# Altium PCB V40_Test_Adapter.PcbDoc
Units mm, origin at the board's own origin, x right, y up, seen from the top; angles counter-clockwise.
Board outline 72.39 x 46.99 mm, 2 copper layers (Top Layer, Bottom Layer), stack 1.57 mm thick; 10 components, 9 nets, 26 pads, 32 vias.
Unrouted connection lines stored in the file: 13.
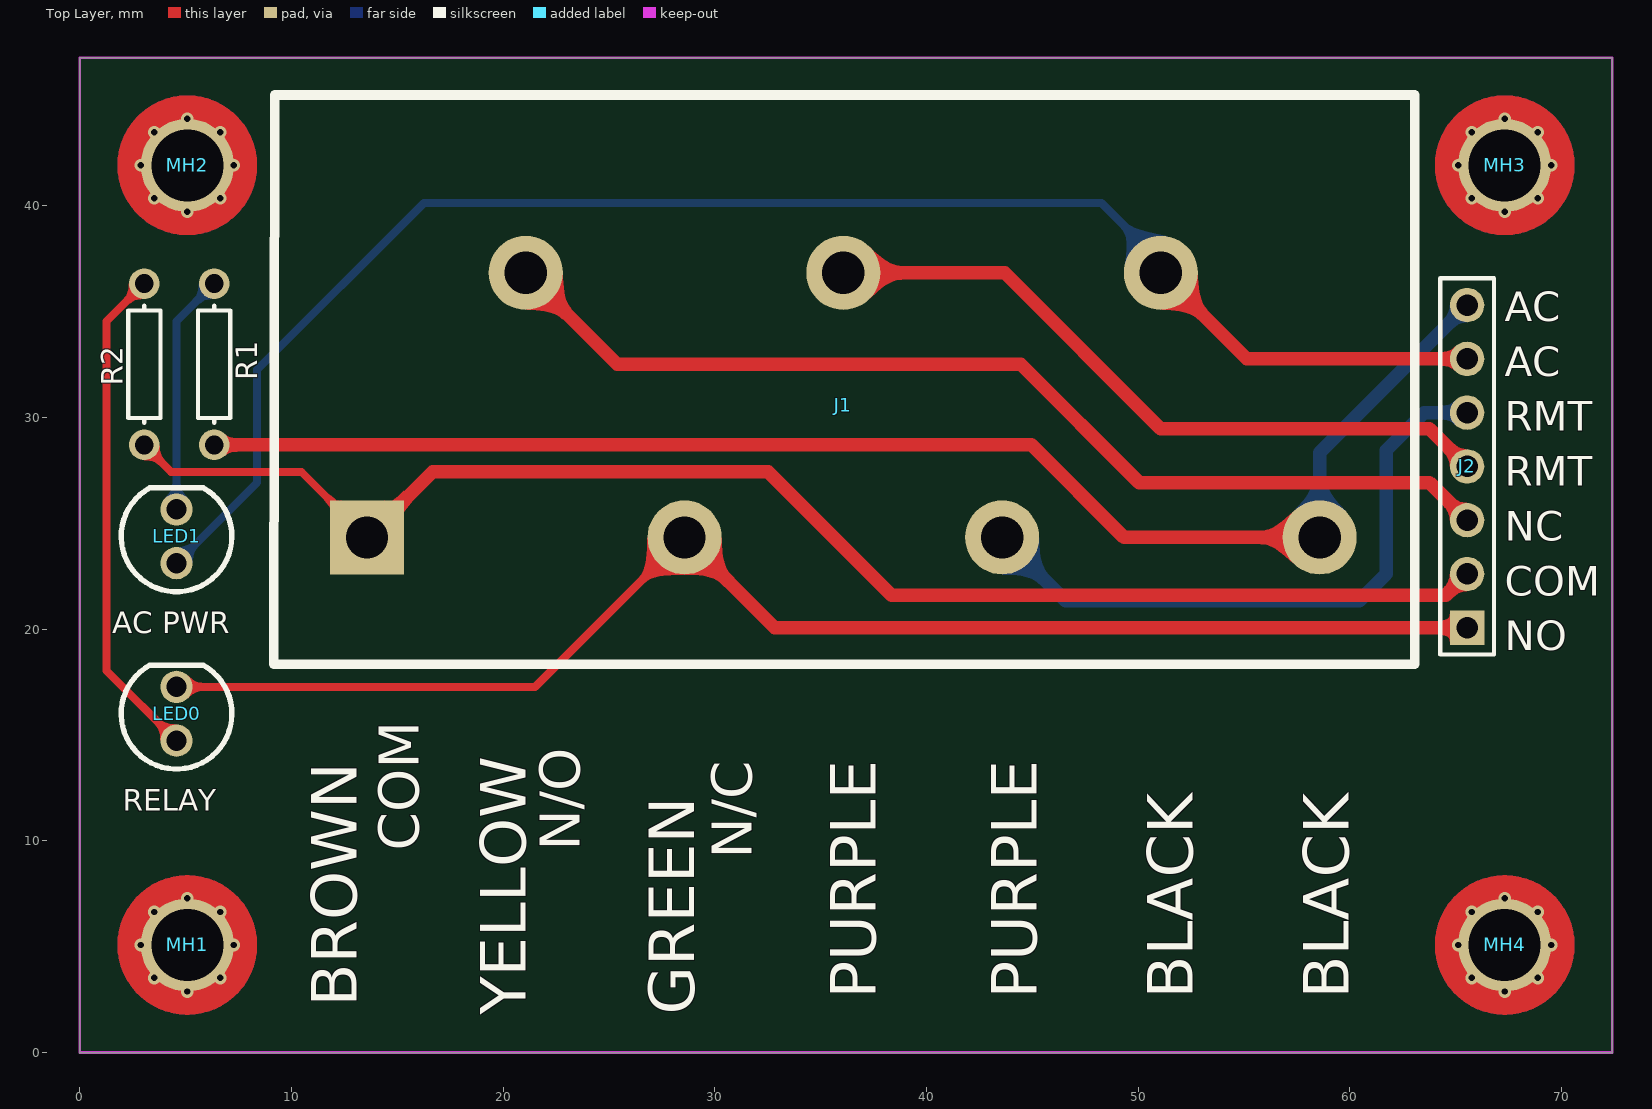
[diagram p0: Top Layer view]
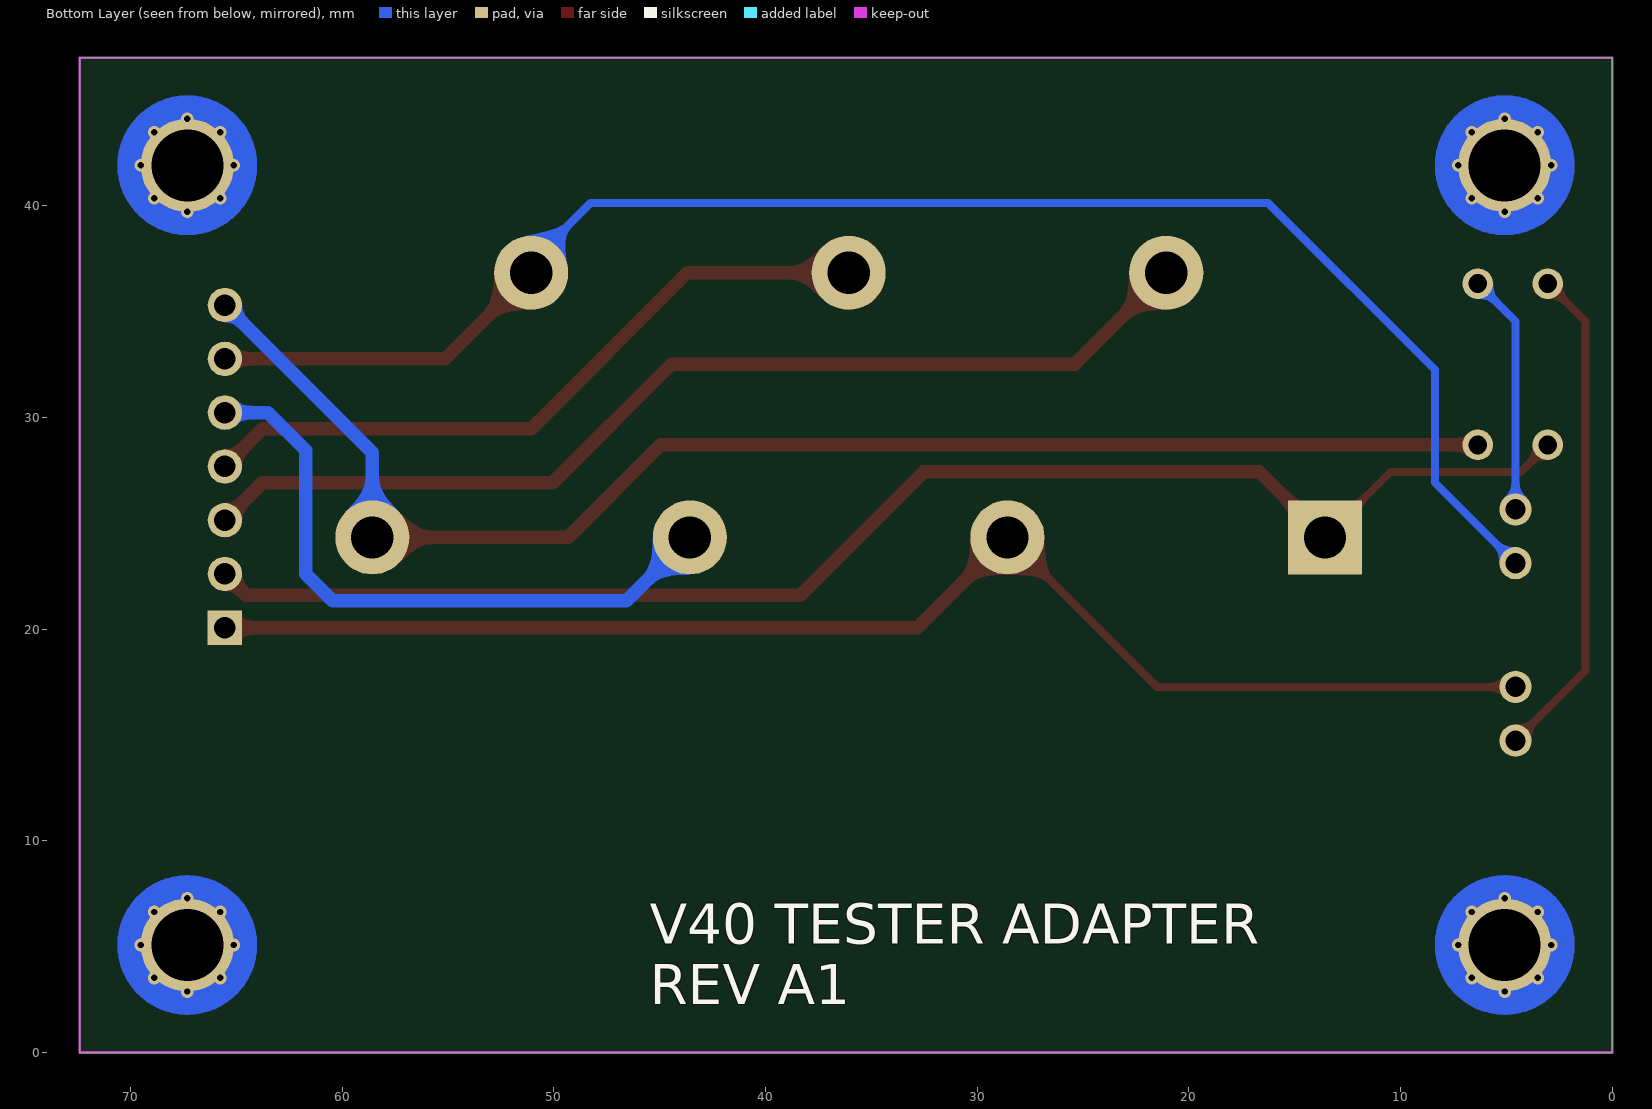
[diagram p1: Bottom Layer view, seen from below]

## Layer stack, top to bottom
Top Solder: solder mask 0.0102, Solder Resist, Dk 3.5
Top Layer: signal copper 0.0356
Dielectric 1: core 1.4986, Core-043, Dk 4.3
Bottom Layer: signal copper 0.0356
Bottom Solder: solder mask 0.0102, Solder Resist, Dk 3.5

## Board outline
0,0 72.39,0 72.39,46.99 0,46.99

## Design rules (kind name [scope] priority, off if disabled: settings)
BoardOutlineClearance [All] p1: gap=0.381 ignorepadtopadclearanceinfootprint=FALSE
Clearance [All] p1: gap=0.152 ignorepadtopadclearanceinfootprint=FALSE
Height [All] p1 off: minheight=0 maxheight=25.4 prefheight=12.7
HoleSize [All] p1: absolutevalues=TRUE maxlimit=3.81 minlimit=0.254 maxpercent=80.000 minpercent=20.000
MinimumAnnularRing [All] p1: minimumring=0.127
MinimumSolderMaskSliver [All] p1: minsoldermaskwidth=0.152
PolygonConnect [All] p1: connectstyle=Relief reliefconductorwidth=0.254 reliefentries=4 polygonreliefangle="90 Angle" airgapwidth=0.254
RoutingVias [All] p1: holewidth=0.711 width=1.27 viastyle="Through Hole" minholewidth=0.711 minwidth=1.27 maxholewidth=0.711 maxwidth=1.27
SilkToSilkClearance [All] p1 off: silktosilkclearance=0.254
SilkToSolderMaskClearance [IsPad] p1 off: minsilkscreentomaskgap=0.254 clearancetoexposedcopper=TRUE
SolderMaskExpansion [All] p1: expansion=0.102 istentingtop=FALSE
Width [All] p1: maxlimit=5.08 minlimit=0.152 preferedwidth=0.381
25 further rules are at their usual default settings.

## Components (designator, comment, footprint, x,y, rotation, side; value= is the part's Value field where it differs from the comment)
J1 "Connector" "PHOENIX TERMINAL BLOCK" 13.568,24.33 r0 top locked
J2 "From Tester" HDR1X7 65.532,20.066 r90 top locked
LED0 "RELAY" LED_2 4.572,14.732 r90 top locked
LED1 "AC PWR" LED_2 4.572,23.114 r90 top locked
MH1 "Mounting Hole" "MOUNTING HOLE" 5.08,5.08 r0 top locked
MH2 "Mounting Hole" "MOUNTING HOLE" 5.08,41.91 r270 top locked
MH3 "Mounting Hole" "MOUNTING HOLE" 67.31,41.91 r0 top locked
MH4 "Mounting Hole" "MOUNTING HOLE" 67.31,5.08 r90 top locked
R1 "3.3K" AXIAL-0.3 6.35,32.512 r270 top locked
R2 "3.3K" AXIAL-0.3 3.048,32.512 r270 top locked value=1K

## Footprints (in the part's own frame and the unit in brackets; to place one, negate y for a bottom-side part, rotate by r counter-clockwise, add the part's x,y. Pads: shape width x height; smd on the part's side, far side on the other; paste and mask are expansions set on the pad)
AXIAL-0.3 [mil] "Axial Device, Thru-Hole; 2 Leads; 0.3 in Pin Spacing"
  round 57 hole 35: 1(-150,0) 2(150,0)
  silkscreen extent -109,-30 109,30
HDR1X7 [mil] "Connector; Header; 7 Position"
  rect 64x64 hole 40: 1(0,0)
  round 64 hole 40: 2(100,0) 3(200,0) 4(300,0) 5(400,0) 6(500,0) 7(600,0)
  silkscreen extent -50,-50 650,50
LED_2 [mil]
  round 60 hole 38: 1(0,0) 2(100,0)
  silkscreen extent -53,-103 140,103, body extent -67,-117 154,117, height 348
"MOUNTING HOLE" [mm] "Mounting Hole"
  round 4.4 hole 3.4 mask+0.038: MOUNT(0,0)
  Top Layer circle w1.2: c0,0 r2.702
  Bottom Layer circle w1.2: c0,0 r2.702
"PHOENIX TERMINAL BLOCK" [mm]
  rect 3.5x3.5 hole 2 mask+0.203: 1(0,0)
  round 3.5 hole 2 mask+0.203: 2(7.5,12.5) 3(15,0) 4(22.5,12.5) 5(30,0) 6(37.5,12.5) 7(45,0)
  silkscreen extent -4.41,-6 49.5,20.9

## Part data
J2: library part "Header 7", "Header, 7-Pin", LatestRevisionDate=17-Jul-2002, LatestRevisionNote="Re-released for DXP Platform.", Publisher="Altium Limited"
LED0 LED1: library part LED0, "Typical INFRARED GaAs LED", LatestRevisionDate=08-Jul-2005, LatestRevisionNote="Mech Layer 1 removed.", PackageDescription="LED; 2 Leads", PackageReference=LED-0, Published=8-Jun-2000, Publisher="Altium Limited"
R1 R2: library part Res1, "Resistor", LatestRevisionDate=17-Jul-2002, LatestRevisionNote="Re-released for DXP Platform.", PackageDescription="Axial Device, Thru-Hole; 2 Leads; 0.3 in Pin Spacing", PackageReference=AXIAL-0.3, Published=8-Jun-2000, Publisher="Altium Limited"

## Via types
v1: diameter 0.6, hole 0.3, Top Layer to Bottom Layer, 32 vias

## Nets (pads, with @x,y where several pads share a name; then routed paths per layer and width w, separated by ;. In a path a pad name is that pad's centre, name@x,y a point inside that pad or via, vN(x,y) a via of type N, cw(c..) or ccw(c..) an arc to the next point about the centre after c; other vN are vias at no path point)
AC1: J1.6 J2.6 LED1.1 | length 74.5
  Top Layer w0.635: J1.6 55.132,32.766 J2.6
  Bottom Layer w0.381: LED1.1 8.382,26.924 8.382,32.258 16.256,40.132 48.26,40.132 51.068,37.324 J1.6
AC2: J1.7 J2.7 R1.2 | length 67.9
  Top Layer w0.635: R1.2 44.958,28.702 49.33,24.33 J1.7
  Bottom Layer w0.635: J1.7 58.568,28.342 J2.7
COM: J1.1 J2.2 R2.2 | length 68.4
  Top Layer w0.381: R2.2 4.318,27.432 10.466,27.432 J1.1
  Top Layer w0.635: J1.1 16.67,27.432 32.512,27.432 38.354,21.59 64.516,21.59 J2.2
NC: J1.2 J2.3 | length 49.3
  Top Layer w0.635: J1.2 25.386,32.512 44.45,32.512 50.038,26.924 63.754,26.924 J2.3
NetLED0_1: LED0.1 R2.1 | length 23.7
  Top Layer w0.381: R2.1 1.27,34.544 1.27,18.034 LED0.1
NetLED1_2: LED1.2 R1.1 | length 11.4
  Bottom Layer w0.381: LED1.2 4.572,34.544 R1.1
NO: J1.3 J2.1 LED0.2 | length 65.6
  Top Layer w0.381: LED0.2 21.51,17.272 J1.3
  Top Layer w0.635: J1.3 32.832,20.066 J2.1
RMT1: J1.4 J2.4 | length 33.3
  Top Layer w0.635: J1.4 43.688,36.83 51.054,29.464 63.754,29.464 J2.4
RMT2: J1.5 J2.5 | length 30.3
  Bottom Layer w0.635: J1.5 46.562,21.336 60.452,21.336 61.722,22.606 61.722,28.448 63.5,30.226 J2.5
pads on no net: MH1.MOUNT MH2.MOUNT MH3.MOUNT MH4.MOUNT
copper on no net:
  other v1: 5.08,2.88 67.31,2.88 3.524,3.524 6.636,3.524 65.754,3.524 68.866,3.524 2.88,5.08 7.28,5.08 65.11,5.08 69.51,5.08 3.524,6.636 6.636,6.636 65.754,6.636 68.866,6.636 5.08,7.28 67.31,7.28 5.08,39.71 67.31,39.71 3.524,40.354 6.636,40.354 65.754,40.354 68.866,40.354 2.88,41.91 7.28,41.91 65.11,41.91 69.51,41.91 3.524,43.466 6.636,43.466 65.754,43.466 68.866,43.466 5.08,44.11 67.31,44.11

## Keep-outs
Keep-Out Layer:
  the board outline again, w0.127

## Silkscreen, mask and mechanical layers (free items; w line width, h text height)
Top Overlay:
  text "AC" at 67.31,34.544 h1.4
  text "AC" at 67.31,31.953 h1.4
  text "RMT" at 67.31,29.361 h1.4
  text "RMT" at 67.31,26.77 h1.4
  text "NC" at 67.31,24.179 h1.4
  text "COM" at 67.31,21.587 h1.4
  text "NO" at 67.31,18.996 h1.4
  text "COM" at 16.002,9.525 h1.91 r90
  text "N/O" at 23.622,9.525 h1.91 r90
  text "N/C" at 31.75,9.144 h1.91 r90
  text "PURPLE" at 37.592,2.54 h2.16 r90
  text "PURPLE" at 45.212,2.54 h2.16 r90
  text "BLACK" at 52.578,2.54 h2.16 r90
  text "BLACK" at 59.944,2.54 h2.16 r90
  text "BROWN" at 13.081,2.159 h2.16 r90
  text "YELLOW" at 21.068,1.778 h2.16 r90
  text "GREEN" at 29.035,1.778 h2.16 r90
Bottom Overlay:
  text "V40 TESTER ADAPTER / REV A1" at 45.466,2.286 h1.91
Drill Drawing:
  circle w0.381: c92.198,100.739 r1.552
  lines w0.254: 0,0 72.39,0 72.39,46.99 0,46.99 0,0
  lines w0.381: 90.646,81.336 93.75,81.336 92.198,78.232 90.646,81.336 ; 90.646,85.993 91.422,85.993 91.422,85.217 92.974,85.217 92.974,85.993 93.75,85.993 93.75,87.545 92.974,87.545 92.974,88.321 91.422,88.321 91.422,87.545 90.646,87.545 90.646,85.993 ; 90.646,92.978 91.422,92.978 92.198,92.202 92.974,92.978 93.75,92.978 92.974,93.754 93.75,94.53 92.974,94.53 92.198,95.306 91.422,94.53 90.646,94.53 91.422,93.754 90.646,92.978 ; 90.646,106.172 90.646,106.948 91.422,107.724 90.646,108.5 90.646,109.276 91.422,109.276 92.198,108.5 92.974,109.276 93.75,109.276 93.75,108.5 92.974,107.724 93.75,106.948 93.75,106.172 92.974,106.172 92.198,106.948 91.422,106.172 90.646,106.172 ; 90.646,113.157 93.75,113.157 93.75,116.261 90.646,116.261 90.646,113.157
  lines w0.508: 87.888,76.136 347.744,76.136 ; 87.888,118.046 347.744,118.046 ; 113.269,69.151 113.269,125.031 ; 138.239,69.151 138.239,125.031 ; 191.606,69.151 191.606,125.031 ; 214.892,69.151 214.892,125.031 ; 248.792,69.151 248.792,125.031 ; 318.452,69.151 318.452,125.031 ; 87.888,69.151 347.744,69.151 347.744,125.031 87.888,125.031 87.888,69.151
  text "Symbol" at 92.079,120.142 h3.35
  text "Count" at 115.365,120.142 h3.35
  text "Hole Size" at 140.335,120.142 h3.35
  text "Plated" at 193.702,120.142 h3.35
  text "Hole Type" at 216.988,120.142 h3.35
  text "Drill Layer Pair" at 250.887,120.142 h3.35
  text "Via/Pad" at 320.547,120.142 h3.35
  text "4" at 115.365,113.157 h2.79
  text "35.00mil (0.889mm)" at 140.335,113.157 h2.79
  text "PTH" at 193.702,113.157 h2.79
  text "Round" at 216.988,113.157 h2.79
  text "Top Layer - Bottom Layer" at 250.887,113.157 h2.79
  text "Pad" at 320.547,113.157 h2.79
  text "4" at 115.365,106.172 h2.79
  text "38.00mil (0.965mm)" at 140.335,106.172 h2.79
  text "PTH" at 193.702,106.172 h2.79
  text "Round" at 216.988,106.172 h2.79
  text "Top Layer - Bottom Layer" at 250.887,106.172 h2.79
  text "Pad" at 320.547,106.172 h2.79
  text "4" at 115.365,99.187 h2.79
  text "133.86mil (3.400mm)" at 140.335,99.187 h2.79
  text "PTH" at 193.702,99.187 h2.79
  text "Round" at 216.988,99.187 h2.79
  text "Top Layer - Bottom Layer" at 250.887,99.187 h2.79
  text "Pad" at 320.547,99.187 h2.79
  text "7" at 115.365,92.202 h2.79
  text "40.00mil (1.016mm)" at 140.335,92.202 h2.79
  text "PTH" at 193.702,92.202 h2.79
  text "Round" at 216.988,92.202 h2.79
  text "Top Layer - Bottom Layer" at 250.887,92.202 h2.79
  text "Pad" at 320.547,92.202 h2.79
  text "7" at 115.365,85.217 h2.79
  text "78.74mil (2.000mm)" at 140.335,85.217 h2.79
  text "PTH" at 193.702,85.217 h2.79
  text "Round" at 216.988,85.217 h2.79
  text "Top Layer - Bottom Layer" at 250.887,85.217 h2.79
  text "Pad" at 320.547,85.217 h2.79
  text "32" at 115.365,78.232 h2.79
  text "11.81mil (0.300mm)" at 140.335,78.232 h2.79
  text "PTH" at 193.702,78.232 h2.79
  text "Round" at 216.988,78.232 h2.79
  text "Top Layer - Bottom Layer" at 250.887,78.232 h2.79
  text "Via" at 320.547,78.232 h2.79
  text "58 Total" at 115.365,71.247 h2.79
  text "DETEX CORP / DANIEL HAHAJ / 302 DETEX DR / NEW BRAUNFELS, TX 78130 / (830) 629-2900 x4370" at 88.9,35.306 h2.79
  text "FAB NOTES: /  TWO LAYERS, 1OZ POUR /  WHITE SILKSCREEN - BOTH SIDES /  BLUE MASK - BOTH SIDES /  0.064\" BOARD THICKNESS /  LEAD FREE HASL FINISH" at 88.9,0 h2.79

## Dimensions
0,0 to 72.39,0 on Drill Drawing
0,0 to 0,46.99 on Drill Drawing